# EAGLE board DETECTOR DE METALES CON 6 INTEGRADOS V2-1 (EAGLE 9.6.2)
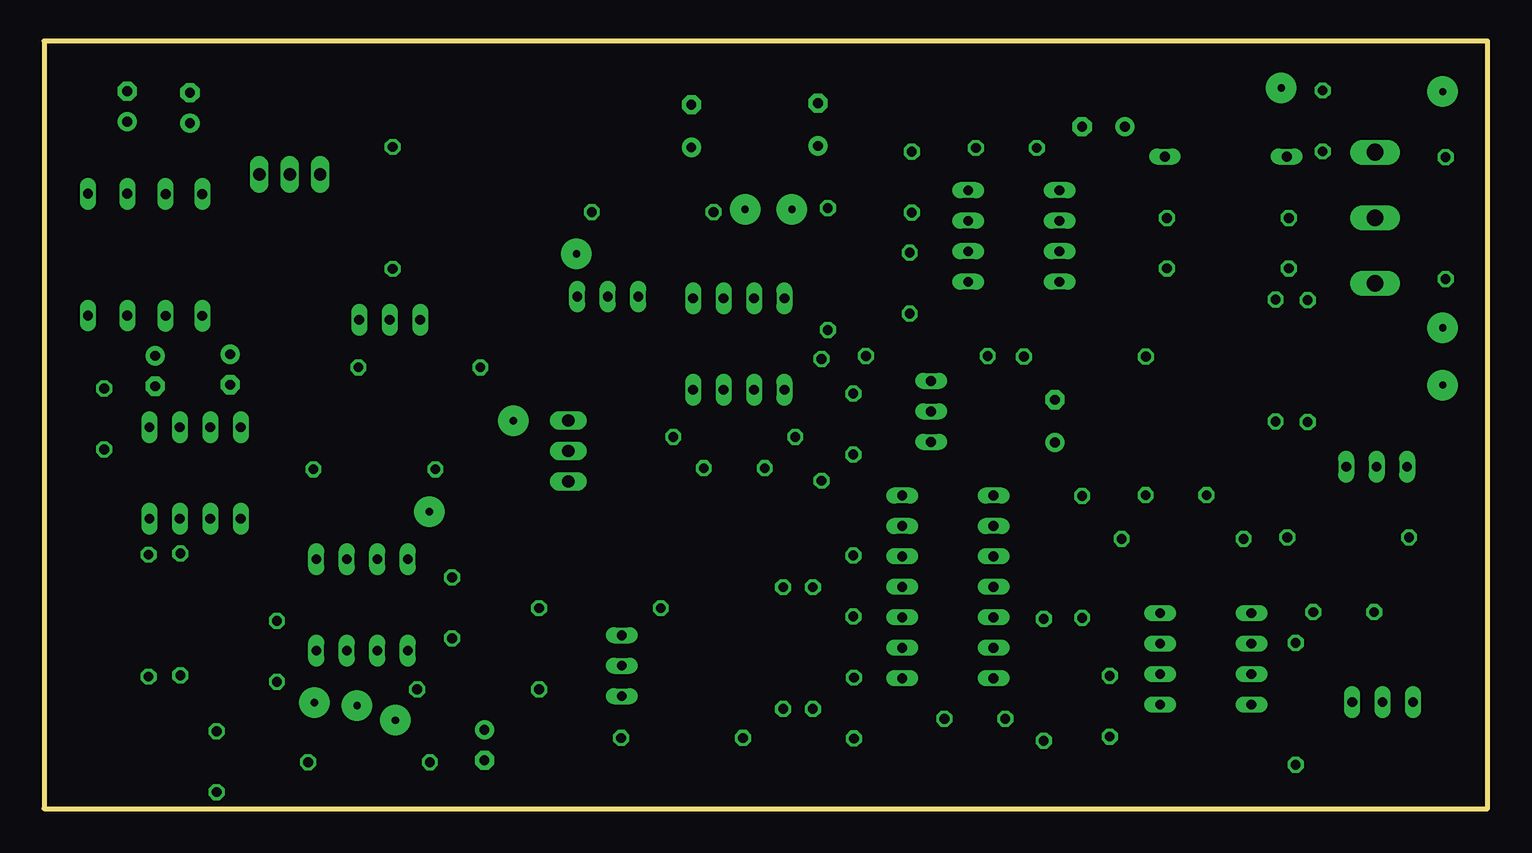
[diagram p0: board, top side]
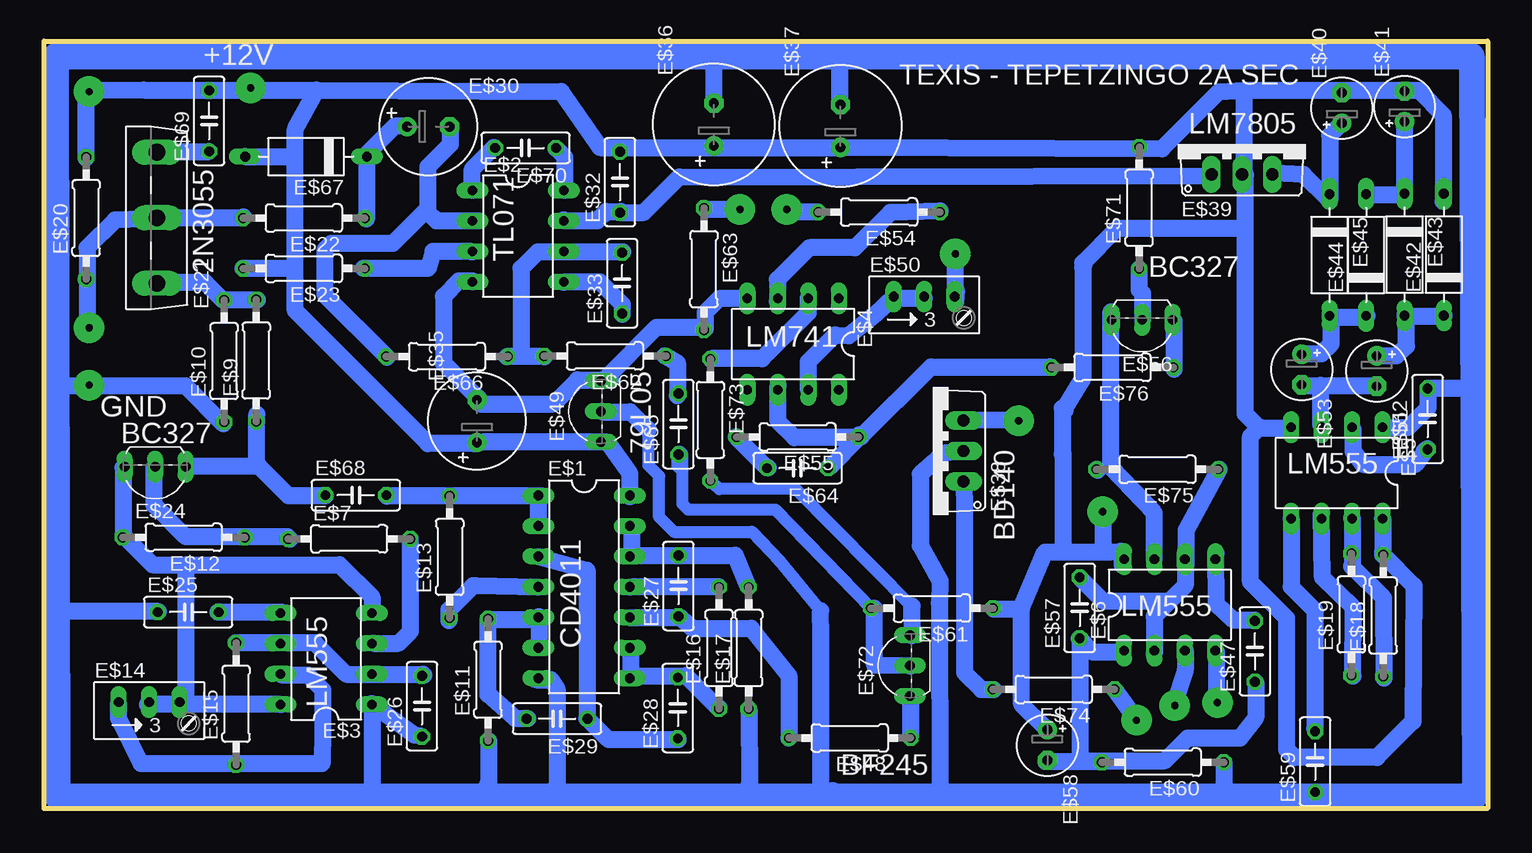
[diagram p1: board, bottom side, seen from below]

Size 120.32 x 64 mm. Coordinates in mm from the lower left corner, seen from the top.
Outline: 120.32,64 0,64 0,0 120.32,0 120.32,64
Copper layers (1*16): Top 0.035mm / dielectric 1.5mm / Bottom 0.035mm
Design rules "default": minimum track width 10mil, minimum drill 24mil, track to track 8mil, track to pad 8mil, pad to pad 8mil, via to via 8mil, smd to smd 8mil, copper to edge 40mil, drill to drill 8mil, minimum pad ring 10mil, minimum via ring 8mil, stop-mask expansion 4mil, vias tented up to drill 0mil, thermal gap 10mil

## Footprints (pad centres in the part's own frame; a part is rotated, then mirrored left to right if it is on the bottom)
DIL14 = drill 0.813 long: 1 -7.62,-3.81; 2 -5.08,-3.81; 3 -2.54,-3.81; 4 0,-3.81; 5 2.54,-3.81; 6 5.08,-3.81; 7 7.62,-3.81; 8 7.62,3.81; 9 5.08,3.81; 10 2.54,3.81; 11 0,3.81; 12 -2.54,3.81; 13 -5.08,3.81; 14 -7.62,3.81
DIL08 = drill 0.813 long: 1 -3.81,-3.81; 2 -1.27,-3.81; 3 1.27,-3.81; 4 3.81,-3.81; 5 3.81,3.81; 6 1.27,3.81; 7 -1.27,3.81; 8 -3.81,3.81
0207/10 = drill 0.813 octagon: 1 -5.08,0; 2 5.08,0
RJ9W = drill 0.813 long: A 2.54,0.635; E -2.54,0.635; S 0,0.635
SOT93V = drill 1.397 long: B -5.461,-2.54; C 0,-2.54; E 5.461,-2.54
TO92-EBC = drill 0.813 long: B 0,-1.27; C 2.54,-1.27; E -2.54,-1.27
C050-025X075 = drill 0.813 octagon: 1 -2.54,0; 2 2.54,0
E3,5-8 = drill 0.813 pad 1.6: + -1.778,0 | drill 0.813 pad 1.6 octagon: - 1.778,0
E3,5-10 = drill 0.813 pad 1.6: + -1.778,0 | drill 0.813 pad 1.6 octagon: - 1.778,0
TO220AV = drill 1.016 long: 1 -2.54,-2.54; 2 0,-2.54; 3 2.54,-2.54
E2,5-5 = drill 0.813 pad 1.6: + -1.27,0 | drill 0.813 pad 1.6 octagon: - 1.27,0
D-10 = drill 0.813 long: A 5.08,0; C -5.08,0

## Placement (x,y rotation side)
E$1  [DIL14]  75.32,18.5 270 bottom
E$2  [DIL08]  80.82,47.75 270 bottom
E$3  [DIL08]  96.82,12.5 90 bottom
E$4  [DIL08]  57.9,38.75 180 bottom
E$5  [DIL08]  12.57,28 180 bottom
E$6  [DIL08]  26.5,17 0 bottom
E$7  [0207/10]  94.9,22.5 0 bottom
E$9  [0207/10]  102.65,37.38 90 bottom
E$10  [0207/10]  105.32,37.33 90 bottom
E$11  [0207/10]  83.32,10.75 90 bottom
E$12  [0207/10]  108.7,22.62 180 bottom
E$13  [0207/10]  86.52,21 90 bottom
E$14  [RJ9W]  111.57,8.25 0 bottom
E$15  [0207/10]  104.32,8.75 90 bottom
E$16  [0207/10]  64.08,13.4 90 bottom
E$17  [0207/10]  61.6,13.4 90 bottom
E$18  [0207/10]  8.7,16.1 90 bottom
E$19  [0207/10]  11.35,16.2 90 bottom
E$20  [0207/10]  116.82,49.25 90 bottom
E$21  [SOT93V]  113.47,49.27 90 bottom
E$22  [0207/10]  98.67,49.25 180 bottom
E$23  [0207/10]  98.67,45.05 180 bottom
E$24  [TO92-EBC]  111.07,27.25 180 bottom
E$25  [C050-025X075]  108.32,16.4 0 bottom
E$26  [C050-025X075]  88.82,8.55 90 bottom
E$27  [C050-025X075]  67.45,18.57 90 bottom
E$28  [C050-025X075]  67.5,8.4 90 bottom
E$29  [C050-025X075]  77.57,7.5 180 bottom
E$30  [E3,5-8]  88.3,56.88 0 bottom
E$32  [C050-025X075]  72.32,52.25 90 bottom
E$33  [C050-025X075]  72.15,43.83 90 bottom
E$35  [E3,5-8]  84.25,32.33 90 bottom
E$36  [E3,5-10]  64.5,57.05 90 bottom
E$37  [E3,5-10]  53.95,56.92 90 bottom
E$38  [TO220AV]  46.23,29.83 90 bottom
E$39  [TO220AV]  20.48,55.42 0 bottom
E$40  [E2,5-5]  12.15,58.42 90 bottom
E$41  [E2,5-5]  6.92,58.55 90 bottom
E$42  [D-10]  3.65,46.2 90 bottom
E$43  [D-10]  6.92,46.2 270 bottom
E$44  [D-10]  10.12,46.17 90 bottom
E$45  [D-10]  13.17,46.17 270 bottom
E$47  [C050-025X075]  19.4,13.12 90 bottom
E$48  [0207/10]  53.18,5.9 180 bottom
E$49  [TO92-EBC]  75.2,33.12 90 bottom
E$50  [RJ9W]  46.98,42.08 0 bottom
E$51  [C050-025X075]  5,32.5 90 bottom
E$52  [E2,5-5]  9.25,36.5 270 bottom
E$53  [E2,5-5]  15.5,36.62 270 bottom
E$54  [0207/10]  50.73,49.75 180 bottom
E$55  [0207/10]  57.52,31 180 bottom
E$56  [TO92-EBC]  28.8,39.5 180 bottom
E$57  [C050-025X075]  34,16.75 90 bottom
E$58  [E2,5-5]  36.7,5.3 270 bottom
E$59  [C050-025X075]  14.38,3.93 90 bottom
E$60  [0207/10]  27.08,3.88 180 bottom
E$61  [0207/10]  46.33,16.73 180 bottom
E$62  [0207/10]  73.57,37.75 180 bottom
E$63  [0207/10]  65.33,45 270 bottom
E$64  [C050-025X075]  57.52,28.4 180 bottom
E$65  [C050-025X075]  67.45,32.08 90 bottom
E$66  [0207/10]  86.75,37.7 180 bottom
E$67  [D-10]  98.5,54.38 180 bottom
E$68  [C050-025X075]  94.35,26.15 0 bottom
E$69  [C050-025X075]  106.57,57.35 90 bottom
E$70  [C050-025X075]  80.2,55.1 180 bottom
E$71  [0207/10]  29.05,50.1 90 bottom
E$72  [TO92-EBC]  49.43,11.93 90 bottom
E$73  [0207/10]  64.8,32.42 270 bottom
E$74  [0207/10]  36.17,9.95 180 bottom
E$75  [0207/10]  27.52,28.3 180 bottom
E$76  [0207/10]  31.27,36.8 180 bottom

## Library data of the parts
E$1-E$6 = 74xx-us
E$7 E$9-E$13 E$15-E$20 E$22 E$23 E$25-E$30 E$32 E$33 E$35-E$37 E$40 E$41 E$47 E$48 E$51-E$55 E$57-E$66 E$68-E$71 E$73-E$76 = rcl
E$14 E$50 = pot
E$21 E$24 E$38 E$39 E$49 E$56 E$72 = transistor-neu-to92
E$42-E$45 E$67 = diode

## Tracks (layer width: path | path; a pad name or v marks a point on that pad's centre or on a via)
S$1
  Bottom 1.422: 79.07,16 79.07,13.5
S$2
  Bottom 1.422: 79.32,15.75 83.32,15.75
S$3
  Bottom 2.184: 1.07,1 1.32,62.75 119.32,62.75 119.2,1 1.07,1 | 1.07,1 1,1.5
S$4
  Bottom 1.422: 79.32,10.75 78.07,10.75 77.57,10 77.57,2
S$5
  Bottom 1.422: 79.07,21 75.07,19.9 75.07,7.5
S$6
  Bottom 1.422: 78.75,26.08 91.75,26.08
S$7
  Bottom 1.422: 86.57,15.7 86.57,16.6 84.57,18.6
S$8
  Bottom 1.422: 108.47,28.5 108.4,28.58 102.47,28.58 102.47,28.62 | 96.9,26.1 99.95,26.1 102.47,28.62 | 102.47,28.62 102.6,28.75 102.6,32.88
S$9
  Bottom 1.422: 79.15,26 79.15,23.65
S$10
  Bottom 1.422: 79.15,18.48 84.32,18.6
S$11
  Bottom 1.422: 91.75,37.65 96.9,42.8 96.9,46.65 96.4,47.15 91.25,47.15 88.35,50.05 | 86.47,56.97 86.47,55.38 88.35,53.5 88.35,50.05 | 88.35,50.05 88.35,49.73 87.65,49.02 84.1,49.02
S$12
  Bottom 1.422: 71.38,23.52 71.38,21.12 62.7,21.12 61.68,18.6
S$13
  Bottom 1.422: 71.5,18.48 71.2,18.52 64.08,18.52
S$14
  Bottom 1.422: 71.45,15.93 71.15,15.95 67.27,15.95 66.3,15.05 61.4,15.05 58.25,11.1 58.25,5.88
S$15
  Bottom 1.422: 71.45,13.35 71.45,11.18 71.52,11.1 66.83,11.1 64.1,8.38 64.05,8.38
S$16
  Bottom 1.422: 61.58,8.3 61.55,2.05 61.7,1.53
S$17
  Bottom 1.422: 67.45,5.75 73.27,5.75 74.97,7.45
S$18
  Bottom 1.422: 83.27,5.62 83.27,2.1 83.4,1.97
S$19
  Bottom 1.422: 80,7.5 81.05,7.5 83.32,9.52 83.32,15.6 83.27,15.8
S$20
  Bottom 1.422: 93,8.75 93,1.6
S$21
  Bottom 1.422: 88.85,6.02 89.45,6.12 92.82,8.57
S$22
  Bottom 1.422: 88.67,11.15 88.75,11.23 95.15,11.23 97.77,13.85 104.32,13.85
S$23
  Bottom 1.422: 92.88,13.8 90.8,13.8 89.8,14.8 89.8,22.48
S$24
  Bottom 1.422: 99.85,22.48 100.05,22.67 108.52,22.67 111.17,25.33 111.17,28.45
S$25
  Bottom 1.422: 113.62,28.58 113.75,28.45 113.75,22.8 111.3,20.35 108.47,20.35 | 108.47,20.35 95.7,20.35 93,17.65 93,16.5 | 108.9,8.75 108.47,9.18 108.47,20.35
S$26
  Bottom 1.422: 100.55,16.38 105.82,16.38 105.77,16.43 105.77,16.45
S$27
  Bottom 1.422: 100.6,8.7 111.72,8.7
S$28
  Bottom 1.422: 110.8,16.45 118.7,16.45
S$29
  Bottom 1.422: 100.55,11.23 100.47,11.15 98.35,11.15 97.1,9.9 97.1,6.62 97.17,3.75 112.25,3.75 114.12,7.57 114.12,8.75
S$30
  Bottom 1.422: 109.85,54.7 111.05,54.8 106.57,54.8
S$31
  Bottom 1.422: 116.82,54.25 116.82,59.95 112.05,59.92 97.62,59.92 | 71.5,26.02 71.5,27.95 73.38,30.58 83.82,30.58 84.45,30.45 88.32,30.45 99.4,41.52 99.4,56.65 97.62,59.92 | 97.62,59.92 77.22,59.8 74,55.12 53.9,55.12
S$32
  Bottom 1.422: 110.92,49.23 114.42,49.1 116.75,46.77 116.75,44.2 116.82,44.12 116.75,44.12
S$33
  Bottom 1.422: 90.05,56.9 91.12,56.9 93.45,54.58 93.45,49.17
S$34
  Bottom 1.422: 110.72,49.27 103.77,49.27 103.7,49.35
S$35
  Bottom 1.422: 76.92,51.55 76.92,54.33 77.67,55.08
S$36
  Bottom 1.422: 84.65,51.55 84.65,53.33 82.82,55.15
S$37
  Bottom 1.422: 53.98,55.08 53.9,55.15 27.15,55.03 22.4,59.78 20.3,59.9 | 20.3,59.9 5.75,59.9 3.7,57.85 3.7,50.65 | 20.17,52.85 20.3,52.97 20.3,59.9
S$38
  Bottom 1.422: 78.62,37.7 81.77,37.7
S$39
  Bottom 1.422: 102.55,42.42 105.45,42.42 106.9,43.88 111.85,43.88
S$40
  Bottom 1.422: 77,49.1 76.92,49.02 74.22,49.02 73.45,49.8 72.27,49.8
S$41
  Bottom 1.422: 84.65,46.45 84.7,46.45 87.92,46.48 88.32,45.05 93.7,45.05
S$42
  Bottom 1.422: 72.1,46.45 79.17,46.45 80.57,45.05 80.57,37.77
S$43
  Bottom 1.422: 77,43.88 76.92,43.95 74.02,43.95 72.15,42.08 72.15,41.23
S$44
  Bottom 1.422: 103.57,54.38 99.6,54.38
S$45
  Bottom 1.422: 103.75,45.08 99.47,45.08
S$46
  Bottom 1.422: 84.6,43.95 84.65,44 85.77,44 87.05,42.73 87.05,37.15 84.15,34.25 84.15,33.88 84.02,33.75 77.88,33.75 75.88,35.75 73.15,35.75
S$47
  Bottom 1.422: 64.47,58.8 64.47,63
S$48
  Bottom 1.422: 53.88,58.67 54,58.8 54,62.5
S$49
  Bottom 1.422: 62.27,49.9 62.35,49.98 65.22,49.98
S$50  (via drill 0.6 pad 2.54)
  other vias: 62.33,49.98 39.1,32.35 44.38,46.27 32.1,24.77 22.52,8.85 26.08,8.6 29.27,7.38
S$51  (via drill 0.6 pad 2.54)
  other vias: 58.43,49.98
S$52
  Bottom 1.422: 10.1,51.2 7.02,51.2 6.92,51.15 6.92,57.3 6.9,57.38 6.97,57.38
S$53
  Bottom 1.422: 12.2,57.12 13.17,56.15 13.17,50.7 | 13.17,50.65 13.17,50.7 | 13.17,50.7 15.35,52.88 17.8,53
S$54  (via drill 0.6 pad 2.54)
  other vias: 116.57,40.1
S$55  (via drill 0.6 pad 2.54)
  other vias: 116.57,35.33
S$56  (via drill 0.6 pad 2.54)
  other vias: 116.57,59.8
S$57  (via drill 0.6 pad 2.54)
  other vias: 103.12,60.1
S$58
  Bottom 1.422: 3.65,41.1 3.7,41.05 6.9,41.05
S$59
  Bottom 1.422: 10.05,41.1 10.18,40.98 13.12,40.98
S$60
  Bottom 1.422: 9.12,35.2 9.18,35.25 15.57,35.25
S$61
  Bottom 1.422: 13.92,32.05 13.92,35.3
S$62
  Bottom 1.422: 9.3,37.77 7.57,37.77 6.77,38.58 6.77,41.1 6.9,41.23
S$63
  Bottom 1.422: 15.57,37.95 13.85,37.95 13.05,38.75 13.05,41.2 13.12,41.27
S$64
  Bottom 1.422: 72.38,49.73 70.35,49.73 67.4,52.67 23.15,52.8
S$65
  Bottom 1.422: 116.77,44.38 116.72,44.33 116.72,40.17
S$66
  Bottom 1.422: 105.4,32.1 108.55,35.25 118.7,35.25
S$67
  Bottom 1.422: 11.27,31.67 11.22,31.62 11.22,29.83 10.43,28.73 6,28.73 5.02,30.02 5.3,29.83
S$68
  Bottom 1.422: 8.7,31.75 8.65,31.8 6.6,31.8 4.95,33.45 4.95,35.08 1.3,35.08
S$69
  Bottom 1.422: 58.4,49.85 58.33,49.77 55.83,49.77
S$70
  Bottom 1.422: 61.73,42.52 64.08,42.52 65.22,41.38 65.22,40
S$71
  Bottom 1.422: 45.65,49.85 49.8,49.73 52.75,46.77 56.55,46.77 59.2,44.12 59.2,42.33
S$72
  Bottom 1.422: 44.3,43.27 44.38,42.12 44.38,46.33
S$73
  Bottom 1.422: 56.62,35 56.62,37.27 54.4,39.5 53.25,39.45 51,41.25 49.5,42.65 49.43,42.58 46.98,42.58
S$74
  Bottom 1.422: 8.75,24.23 8.75,21.38
S$75
  Bottom 1.422: 52.4,30.95 54.88,28.48 54.98,28.48
S$76
  Bottom 1.422: 11.22,11.07 11.2,16.77 13.78,19.27 13.85,24.65
S$77
  Bottom 1.422: 8.62,10.9 8.62,11.07 8.68,17.57 11.32,20.23 11.27,20.1 11.27,24.15 11.35,24.23
S$78
  Bottom 1.422: 8.75,21.2 6.15,18.6 6.22,7.27 9.22,4.28 16.07,4.28 16.75,4.95 16.75,15.88 19.77,18.9 19.77,31.05 19.07,31.75 16.57,31.75
S$79
  Bottom 1.422: 19.42,15.73 21.15,15.73 22.6,17.07 22.65,21.33
S$80
  Bottom 1.422: 16.38,24.17 16.38,18.5 14.42,16.55 14.42,6.68
S$81
  Bottom 1.422: 62.65,31 60.08,28.42 59.95,28.42
S$82
  Bottom 1.422: 52.4,31.17 52.62,30.95 57.8,30.95 59.15,32.3 59.15,35.3
S$83
  Bottom 1.422: 68.57,37.77 67.55,37.17 67.55,34.42
S$84
  Bottom 1.016: 69.97,31.62 69.97,28.65 69.05,27.73 69.1,27.67 69.1,24.38 67.83,23.1 61.33,23.1 59.05,20.65 55.6,16.5
  Bottom 1.422: 73.85,33.15 73.8,33.1 71.45,33.1 69.97,31.62 | 54.6,1.5 55.58,1.45 55.58,14.4 55.6,16.5
S$85
  Bottom 1.422: 48.12,9.32 48.12,5.98
S$86
  Bottom 1.422: 56.62,42.55 56.65,42.52 56.65,41.35 60.48,37.52 64.72,37.52
S$87
  Bottom 1.422: 73.57,35.85 69.27,40.15 65.7,40.15
S$88
  Bottom 1.016: 67.35,28.62 67.15,28.3 67.15,25.45 66.65,24.95 59.38,24.95 51.33,16.68
  Bottom 1.422: 67.4,29.58 67.35,29.5 67.35,28.62
S$89
  Bottom 1.016: 47.98,16.88 57.68,26.65 64.05,26.65 64.75,27.23
  Bottom 1.422: 48,14.45 47.95,14.5 47.98,16.88
S$90
  Bottom 1.422: 45.65,18.98 45.7,17.15 45.68,1.07
S$91
  Bottom 1.422: 43.65,27.25 43.6,24.98 43.6,11.35 42.2,9.95 41.18,9.95
S$92
  Bottom 1.422: 44.2,32.45 39.27,32.42
S$93
  Bottom 1.422: 41.18,16.65 38.93,16.65 38.9,16.68 36.9,21.4 31.52,21.4 30.58,21.48 30.45,20.32
S$94
  Bottom 1.422: 25.15,20.77 25.2,20.73 25.2,18.62 27.8,16.02 27.8,12.93
S$95
  Bottom 1.422: 33.98,19.25 32.08,17.35 26.52,17.35
S$96
  Bottom 1.422: 36.77,6.65 38.85,8.73 38.85,16.7
S$97
  Bottom 1.422: 36.85,3.95 32.05,3.95
S$98
  Bottom 1.422: 22.4,28.3 25.15,23.23 25.15,20.4
S$99
  Bottom 1.422: 27.8,20.83 27.8,24.65 31.4,28.45 31.4,41.45
S$100
  Bottom 1.422: 26.15,40.7 26.15,36.65
S$101
  Bottom 1.422: 52.43,31.02 52.23,31.02 46.4,36.85 36.5,36.85
S$102
  Bottom 1.422: 28.75,40.75 28.75,42.98 29.05,43.27 29.05,45
S$103
  Bottom 1.422: 48.12,11.9 51.1,11.98 51.12,16.73
S$104
  Bottom 1.422: 32.05,24.8 32.08,24.77 32.08,21.5
S$105
  Bottom 1.422: 22.62,13.15 22.62,8.98
S$106
  Bottom 1.422: 25.2,13.23 25.2,11.57 26.1,8.8
S$107
  Bottom 1.422: 31.08,9.93 29.38,7.52
S$108
  Bottom 1.422: 21.98,3.8 21.98,1.12
S$109
  Bottom 1.422: 33.62,45.5 33.75,45.12 33.75,35.92 35.38,33.25
S$110
  Bottom 1.422: 34.05,14.2 32.9,13.05 30.38,13.05
S$111
  Bottom 1.422: 33.98,13.93 33.98,4.05 33.92,4 26.9,4 25.02,5.88 20.65,5.88 19.32,7.6 19.32,10.57
S$112
  Bottom 1.422: 20.48,53.22 20.23,52.97 20.23,32.95 19.1,31.83 18.98,31.83
S$113
  Bottom 1.422: 33.75,45.5 30.85,48.4 20.48,48.4
S$114
  Bottom 1.422: 35.23,33.23 35.45,33.4 35.45,29.58 35.42,29.75 35.4,21.8
S$115
  Bottom 1.422: 43.77,29.85 43.77,29.77 45.27,29.65 47.3,27.9 47.3,21.92 45.73,19.12
S$116
  Bottom 1.422: 32.6,28.3 32.52,28.23

## Text on the board
bNames: +12V | TEXIS - TEPETZINGO 2A SEC | LM7805 | TL071 | BC327 | 2N3055 | LM741 | GND | BC327 | BD140 | 79L05 | LM555 | LM555 | CD4011 | LM555 | BF245